# EAGLE board Arduino_Micro_Rev03j (EAGLE 7.3.0)
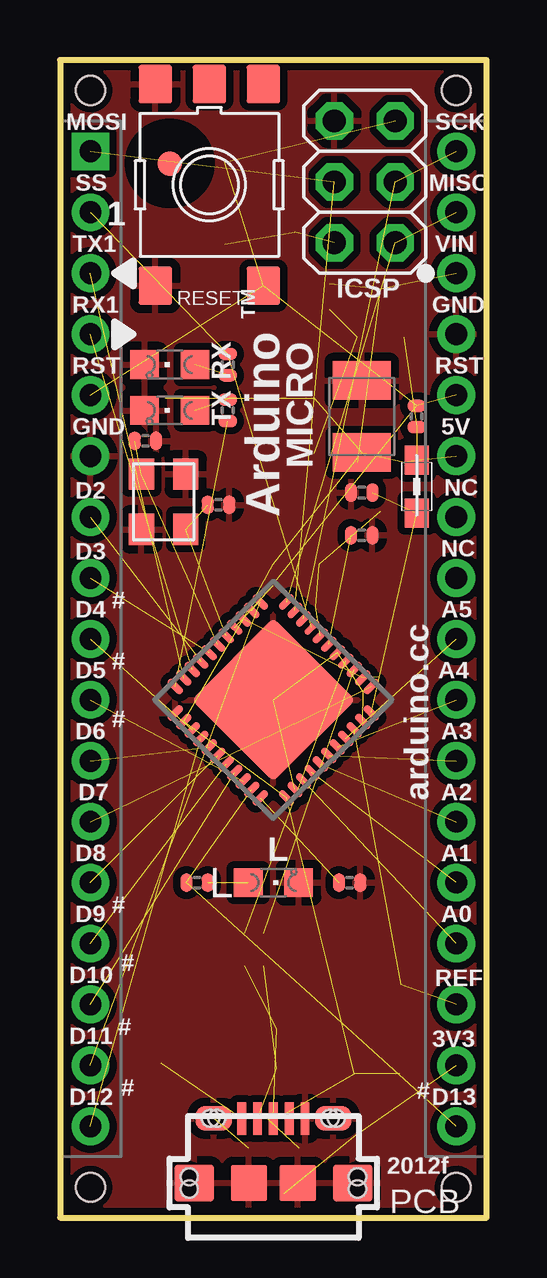
[diagram p0: board, top side]
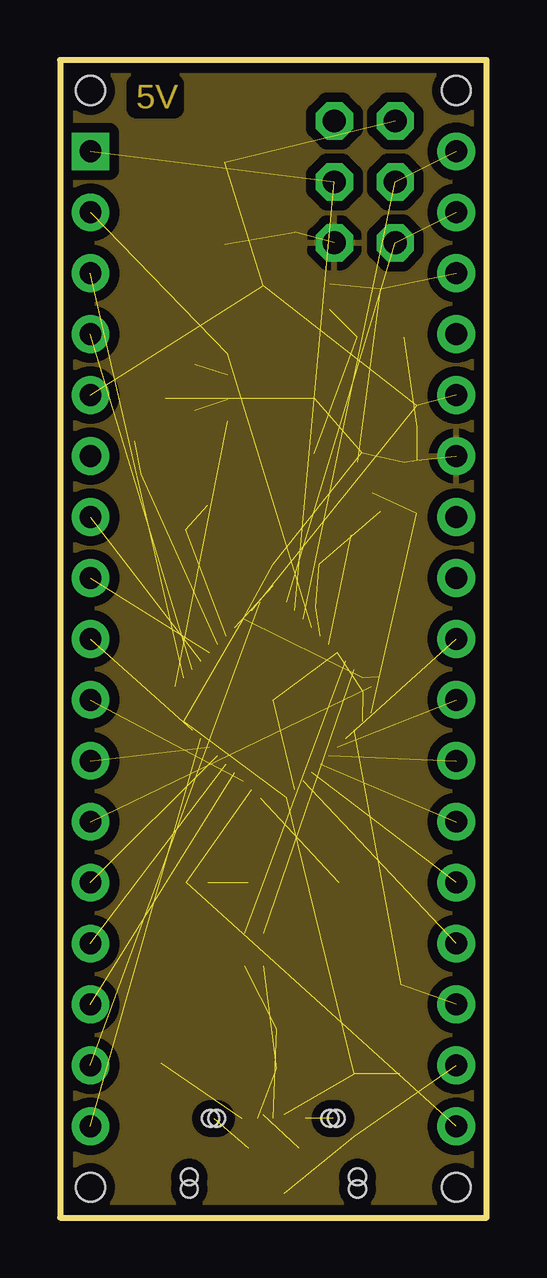
[diagram p1: board, inner layer POWER]
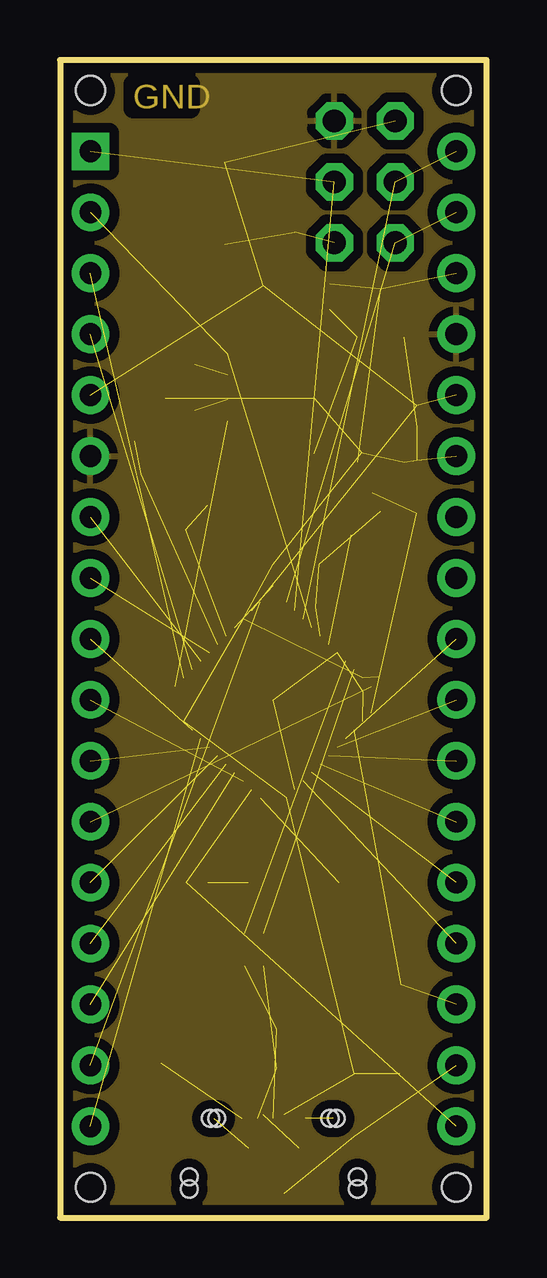
[diagram p2: board, inner layer GROUND]
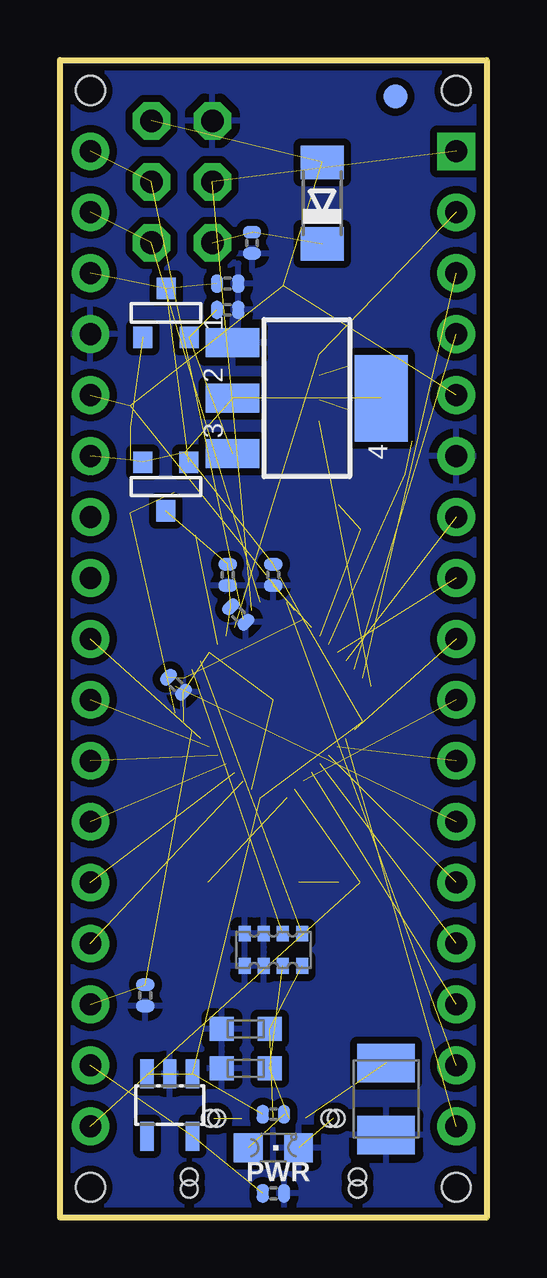
[diagram p3: board, bottom side, seen from below]

Size 17.78 x 48.26 mm. Coordinates in mm from the lower left corner, seen from the top.
Outline: 0,0 17.78,0 17.78,48.26 0,48.26 0,0
Copper layers (1*2+15*16): Top 0.035mm / dielectric 0.5mm / POWER 0.035mm / dielectric 0.4mm / GROUND 0.035mm / dielectric 0.5mm / Bottom 0.035mm
Design rules "default": minimum track width 8mil, minimum drill 18mil, track to track 8mil, track to pad 8mil, pad to pad 8mil, via to via 8mil, smd to smd 7mil, copper to edge 8mil, drill to drill 8mil, minimum pad ring 12mil, minimum via ring 8mil, stop-mask expansion 1mil, vias tented up to drill 20mil, thermal gap 14mil
Net classes: 0 default: width 0.254 mm, drill 0.61 mm, clearance 0.203 mm
Holes 1.2 mm at 1.27,1.27 16.51,1.27 1.27,46.99 16.51,46.99

## Footprints (pad centres in the part's own frame; a part is rotated, then mirrored left to right if it is on the bottom)
C0402 = smd 0.508 x 0.762: 1 -0.445,0; 2 0.445,0
SMC_B = smd 1.6 x 2.4: + -1.5,0; - 1.5,0
MINIMELF = smd 1.4 x 1.8: A 1.7,0; C -1.7,0
CON2_USB_MICRO_B_AT = smd 0.406 x 1.346: P1 -1.321,2.692; P2 -0.66,2.692; P3 0,2.692; P4 0.66,2.692; P5 1.321,2.692 | smd 1.651 x 1.549: S1 -3.302,0; S2 3.302,0 | smd 1.524 x 1.016: S3 -2.489,2.692; S4 2.489,2.692 | smd 1.524 x 1.524: S5 -1.016,0; S6 1.016,0 | hole 0.7: -3.505,0.254; -3.505,-0.254; 3.505,0.254; 3.505,-0.254; -2.616,2.692; -2.362,2.692; 2.362,2.692; 2.616,2.692
2X03 = drill 0.95 pad 1.55 octagon: 1 -2.54,-1.27; 2 -2.54,1.27; 3 0,-1.27; 4 0,1.27; 5 2.54,-1.27; 6 2.54,1.27
HEAD17-NOSS = drill 0.914 pad 1.575 square: 1 0,0 | drill 0.914 pad 1.575: 2 2.54,0; 3 5.08,0; 4 7.62,0; 5 10.16,0; 6 12.7,0; 7 15.24,0; 8 17.78,0; 9 20.32,0; 10 22.86,0; 11 25.4,0; 12 27.94,0; 13 30.48,0; 14 33.02,0; 15 35.56,0; 16 38.1,0; 17 40.64,0
HEAD17-NOSS-1 = drill 0.914 pad 1.575: 1 0,0; 2 2.54,0; 3 5.08,0; 4 7.62,0; 5 10.16,0; 6 12.7,0; 7 15.24,0; 8 17.78,0; 9 20.32,0; 10 22.86,0; 11 25.4,0; 12 27.94,0; 13 30.48,0; 14 33.02,0; 15 35.56,0; 16 38.1,0; 17 40.64,0
CHIPLED_0805 = smd 1.2 x 1.2: A 0,-1.05; C 0,1.05
0805 = smd 1.2 x 1: 1 -1.1,0; 2 1.1,0
R0402 = smd 0.508 x 0.762: 1 -0.445,0; 2 0.445,0
TS42 = smd 1.6 x 1.4: 1 -4.2,2.25; 2 4.2,2.25; 3 -4.2,-2.25; 4 4.2,-2.25; 5 -4.2,0
CAY16 = smd 0.5 x 0.65: 1 -1.2,-0.675; 2 -0.4,-0.675; 3 0.4,-0.675; 4 1.2,-0.675; 5 1.2,0.675; 6 0.4,0.675; 7 -0.4,0.675; 8 -1.2,0.675
SOT-23 = smd 0.787 x 0.889: 1 0.025,-1.016; 2 -0.94,1.016; 3 0.991,1.016
QFN44ML7X7 = smd 0.75 x 0.275: 1 -3.275,2.5; 2 -3.275,2; 3 -3.275,1.5; 4 -3.275,1; 5 -3.275,0.5; 6 -3.275,0; 7 -3.275,-0.5; 8 -3.275,-1; 9 -3.275,-1.5; 10 -3.275,-2; 11 -3.275,-2.5; 23 3.275,-2.5; 24 3.275,-2; 25 3.275,-1.5; 26 3.275,-1; 27 3.275,-0.5; 28 3.275,0; 29 3.275,0.5; 30 3.275,1; 31 3.275,1.5; 32 3.275,2; 33 3.275,2.5 | smd 0.275 x 0.75: 12 -2.5,-3.275; 13 -2,-3.275; 14 -1.5,-3.275; 15 -1,-3.275; 16 -0.5,-3.275; 17 0,-3.275; 18 0.5,-3.275; 19 1,-3.275; 20 1.5,-3.275; 21 2,-3.275; 22 2.5,-3.275; 34 2.5,3.275; 35 2,3.275; 36 1.5,3.275; 37 1,3.275; 38 0.5,3.275; 39 0,3.275; 40 -0.5,3.275; 41 -1,3.275; 42 -1.5,3.275; 43 -2,3.275; 44 -2.5,3.275 | smd 4.826 x 4.826: EXP 0,0
SOT223 = smd 1.219 x 2.235: 1 -2.311,-3.099; 2 0,-3.099; 3 2.311,-3.099 | smd 3.6 x 2.2: 4 0,3.099
SOT23-DBV = smd 0.55 x 1.2: 1 -0.95,-1.3; 2 0,-1.3; 3 0.95,-1.3; 4 0.95,1.3; 5 -0.95,1.3
FIDUCIA-MOUNT = smd 1.016 x 1.016: P$1 0,0
FIDUCIAL-1X2 = smd 1 x 1: 1 0,0
CRYSTAL-3.2-2.5 = smd 1.3 x 1.05: 1 -1.15,-0.925; 2 1.15,-0.925; 3 1.15,0.925; 4 -1.15,0.925
CT/CN0603 = smd 1 x 1: 1 -1,0; 2 1,0

## Placement (x,y rotation side)
C1  100n  [C0402]  10.79,37.85 0 bottom
C2  100n  [C0402]  9.78,40.64 270 bottom
C3  22u  [SMC_B]  12.57,33.4 90 top
C4  1uF  [C0402]  8.89,1.02 0 bottom
C5  1uF  [C0402]  12.57,28.45 0 top
C6  100n  [C0402]  14.22,9.27 270 bottom
C7  1uF  [C0402]  12.57,30.23 180 top
C9  100n  [C0402]  10.79,26.8 270 bottom
C10  100n  [C0402]  8.89,26.8 270 bottom
C11  100n  [C0402]  12.95,22.23 315 bottom
C12  22pF  [C0402]  6.6,29.72 180 top
C13  22pF  [C0402]  3.56,32.38 180 top
C14  22u  [SMC_B]  4.19,4.95 270 bottom
D2  CD1206-S01575  [MINIMELF]  6.86,42.29 90 bottom
J3  USB-MICRO!!!  [CON2_USB_MICRO_B_AT]  8.89,1.45 0 top
J4  3x2M  [2X03]  12.7,43.18 90 top
J5  HEAD17-NOSS  [HEAD17-NOSS]  1.27,44.45 270 top
J6  HEAD17-NOSS-1  [HEAD17-NOSS-1]  16.51,44.45 270 top
L  green  [CHIPLED_0805]  8.89,13.97 270 top
L2  MH2029-300Y  [0805]  14.86,30.48 270 top
ON  blue  [CHIPLED_0805]  8.89,2.92 270 bottom
R1  10K  [R0402]  14.86,33.4 90 top
R2  10K  [R0402]  10.35,25.15 135 bottom
R4  10K  [R0402]  12.06,13.97 0 top
R5  1K  [R0402]  8.89,4.32 0 bottom
R6  1K  [R0402]  6.99,33.66 90 top
R7  1K  [R0402]  6.99,35.56 270 top
R8  1K  [R0402]  5.71,13.97 0 top
R9  10K  [R0402]  10.79,38.94 180 bottom
RESET  TS42  [TS42]  6.22,43.05 270 top
RP3  22R  [CAY16]  8.89,11.18 180 bottom
RX  yellow  [CHIPLED_0805]  4.57,35.56 90 top
T1  FDN340P/PMV48XP  [SOT-23]  13.4,30.48 0 bottom
T2  PMV48XP  [SOT-23]  13.34,37.72 180 bottom
TX  yellow  [CHIPLED_0805]  4.57,33.66 90 top
U1  ATMEGA32U4-XUMU  [QFN44ML7X7]  8.89,21.59 225 top
U2  NCP1117-5  [SOT223]  7.49,34.16 270 bottom
U4  LP2985-33DBVR  [SOT23-DBV]  13.21,4.7 180 bottom
U$3  DISCLAIMER  [DISCLAIMER]  -4.7,-22.48 0 top  (outside the outline)
U$37  FIDUCIALMOUNT  [FIDUCIA-MOUNT]  4.57,43.94 0 top
U$53  FIDUCIAL1X2  [FIDUCIAL-1X2]  3.81,46.74 0 bottom
Y3  16MHz KX-7  [CRYSTAL-3.2-2.5]  4.32,29.84 90 top
Z1  CG0603MLC-05E  [CT/CN0603]  10.03,7.87 180 bottom
Z2  CG0603MLC-05E  [CT/CN0603]  10.03,6.22 180 bottom

## Library data of the parts
C1 C2 C4-C7 C9-C13 J3-J6 R1 R2 R4-R9 RESET U1 U4 U$3 U$37 Y3 = SmartPrj
C3 C14 = rcl
D2 = diode
L ON RX TX = led
L2 = wuerth-elektronik
RP3 = resistor-dil
T1 T2 = zetex
U2 = linear
U$53 = SparkFun
Z1 Z2 = varistor

## Nets
3V3: C4.1 J6.16 U4.5
5-GND: RESET.5
+5V: C2.1 C3.+ C10.1 C11.1 D2.C J4.2 J6.6 L2.1 R1.1 R5.1 T1.2 T2.3 U1.2 U1.14 U1.24 U1.34 U2.2 U2.4 U4.1 U4.3
+VIN: C1.1 T2.2 U2.3
A0: J6.14 U1.36
A1: J6.13 U1.37
A2: J6.12 U1.38
A3: J6.11 U1.39
A4: J6.10 U1.40
A5: J6.9 U1.41
AREF: C6.1 J6.15 U1.42
AVCC: C7.1 L2.2 U1.44
D0/RX: J5.4 U1.20
D1/TX: J5.3 U1.21
D2/SDA: J5.7 U1.19
D3/SCL: J5.8 U1.18
D4*: J5.9 U1.25
D5*: J5.10 U1.31
D6*: J5.11 U1.27
D7: J5.12 U1.1
D+: J3.P3 RP3.8 Z1.1
D-: J3.P2 RP3.7 Z2.1
GND: C1.2 C2.2 C3.- C4.2 C5.2 C6.2 C7.2 C9.2 C10.2 C11.2 C12.1 C13.1 C14.- J3.P5 J3.S1 J3.S2 J3.S3 J3.S4 J3.S5 J3.S6 J4.6 J5.6 J6.4 L.C ON.C R2.1 R4.2 R9.1 RESET.3 RESET.4 RP3.3 RP3.4 RP3.5 RP3.6 RX.C TX.C U1.5 U1.15 U1.23 U1.35 U1.43 U1.EXP U2.1 U4.2 Y3.2 Y3.4 Z1.2 Z2.2
HWB: R4.1 U1.33
IO8: J5.13 U1.28
IO9*: J5.14 U1.29
IO10*: J5.15 U1.30
IO11*: J5.16 U1.12
IO12*: J5.17 U1.26
IO13*: J6.17 R8.1 U1.32
MISO: J4.1 J6.2 U1.11
MOSI: J4.4 J5.1 U1.10
N$2: R7.2 RX.A
N$3: ON.A R5.2
N$4: R6.2 TX.A
N$7: L.A R8.2
RD+: RP3.1 U1.4
RD-: RP3.2 U1.3
RESET: D2.A J4.5 J5.5 J6.5 R1.2 RESET.2 U1.13
RXLED/SS: J5.2 R7.1 U1.8
SCK: J4.3 J6.1 U1.9
TXLED: R6.1 U1.22
UCAP: C5.1 U1.6
VIN: J6.3 R9.2 T1.3 T2.1
VUSB: C9.1 R2.2 T1.1 U1.7
VUSBD: C14.+ J3.P1
XTAL1: C13.2 U1.17 Y3.3
XTAL2: C12.2 U1.16 Y3.1

## Tracks (layer width: path | path; a pad name or v marks a point on that pad's centre or on a via)
3V3  (2 unrouted)
+5V  (18 unrouted)
  pour POWER (isolate 0.406): -0.64,48.9 18.41,48.9 18.41,-0.64 -0.64,-0.64
+VIN  (2 unrouted)
A0  (1 unrouted)
A1  (1 unrouted)
A2  (1 unrouted)
A3  (1 unrouted)
A4  (1 unrouted)
A5  (1 unrouted)
AREF  (2 unrouted)
AVCC  (2 unrouted)
D0/RX  (1 unrouted)
D1/TX  (1 unrouted)
D2/SDA  (1 unrouted)
D3/SCL  (1 unrouted)
D4*  (1 unrouted)
D5*  (1 unrouted)
D6*  (1 unrouted)
D7  (1 unrouted)
D+  (2 unrouted)
D-  (2 unrouted)
GND  (7 unrouted)
  pour GROUND (isolate 0.406): -1.27,49.53 19.05,49.53 19.05,-1.27 -1.27,-1.27
  pour Bottom (isolate 0.305): 19.68,50.16 -1.91,50.16 -1.91,-1.91 19.68,-1.91
  pour Top (isolate 0.305): -2.54,50.8 20.32,50.8 20.32,-2.54 -2.54,-2.54
HWB  (1 unrouted)
IO8  (1 unrouted)
IO9*  (1 unrouted)
IO10*  (1 unrouted)
IO11*  (1 unrouted)
IO12*  (1 unrouted)
IO13*  (2 unrouted)
MISO  (2 unrouted)
MOSI  (2 unrouted)
N$2  (1 unrouted)
N$3  (1 unrouted)
N$4  (1 unrouted)
N$7  (1 unrouted)
RD+  (1 unrouted)
RD-  (1 unrouted)
RESET  (6 unrouted)
RXLED/SS  (2 unrouted)
SCK  (2 unrouted)
TXLED  (1 unrouted)
UCAP  (1 unrouted)
VIN  (3 unrouted)
VUSB  (3 unrouted)
VUSBD  (1 unrouted)
XTAL1  (2 unrouted)
XTAL2  (2 unrouted)

## Text on the board
POWER: 5V
GROUND: GND
tPlace: MOSI | SCK | SS | MISO | 1 | TX1 | VIN | RX1 | ICSP | GND | TM | RST | RX | RST | GND | TX | 5V | MICRO | D2 | NC | Arduino | NC | D3 | D4 | # | A5 | # | D5 | A4 | D6 | # | A3 | D7 | arduino.cc | A2 | D8 | L | A1 | # | D9 | A0 | D10 | # | REF | # | D11 | 3V3 | D12 | # | # | D13 | 2012f
bPlace: PWR